# Altium PCB board.PcbDoc
Units mm, origin at the board's own origin, x right, y up, seen from the top; angles counter-clockwise.
Board outline 94 x 69 mm, 2 copper layers (Top Layer, Bottom Layer); 27 components, 94 nets, 289 pads, 27 vias.
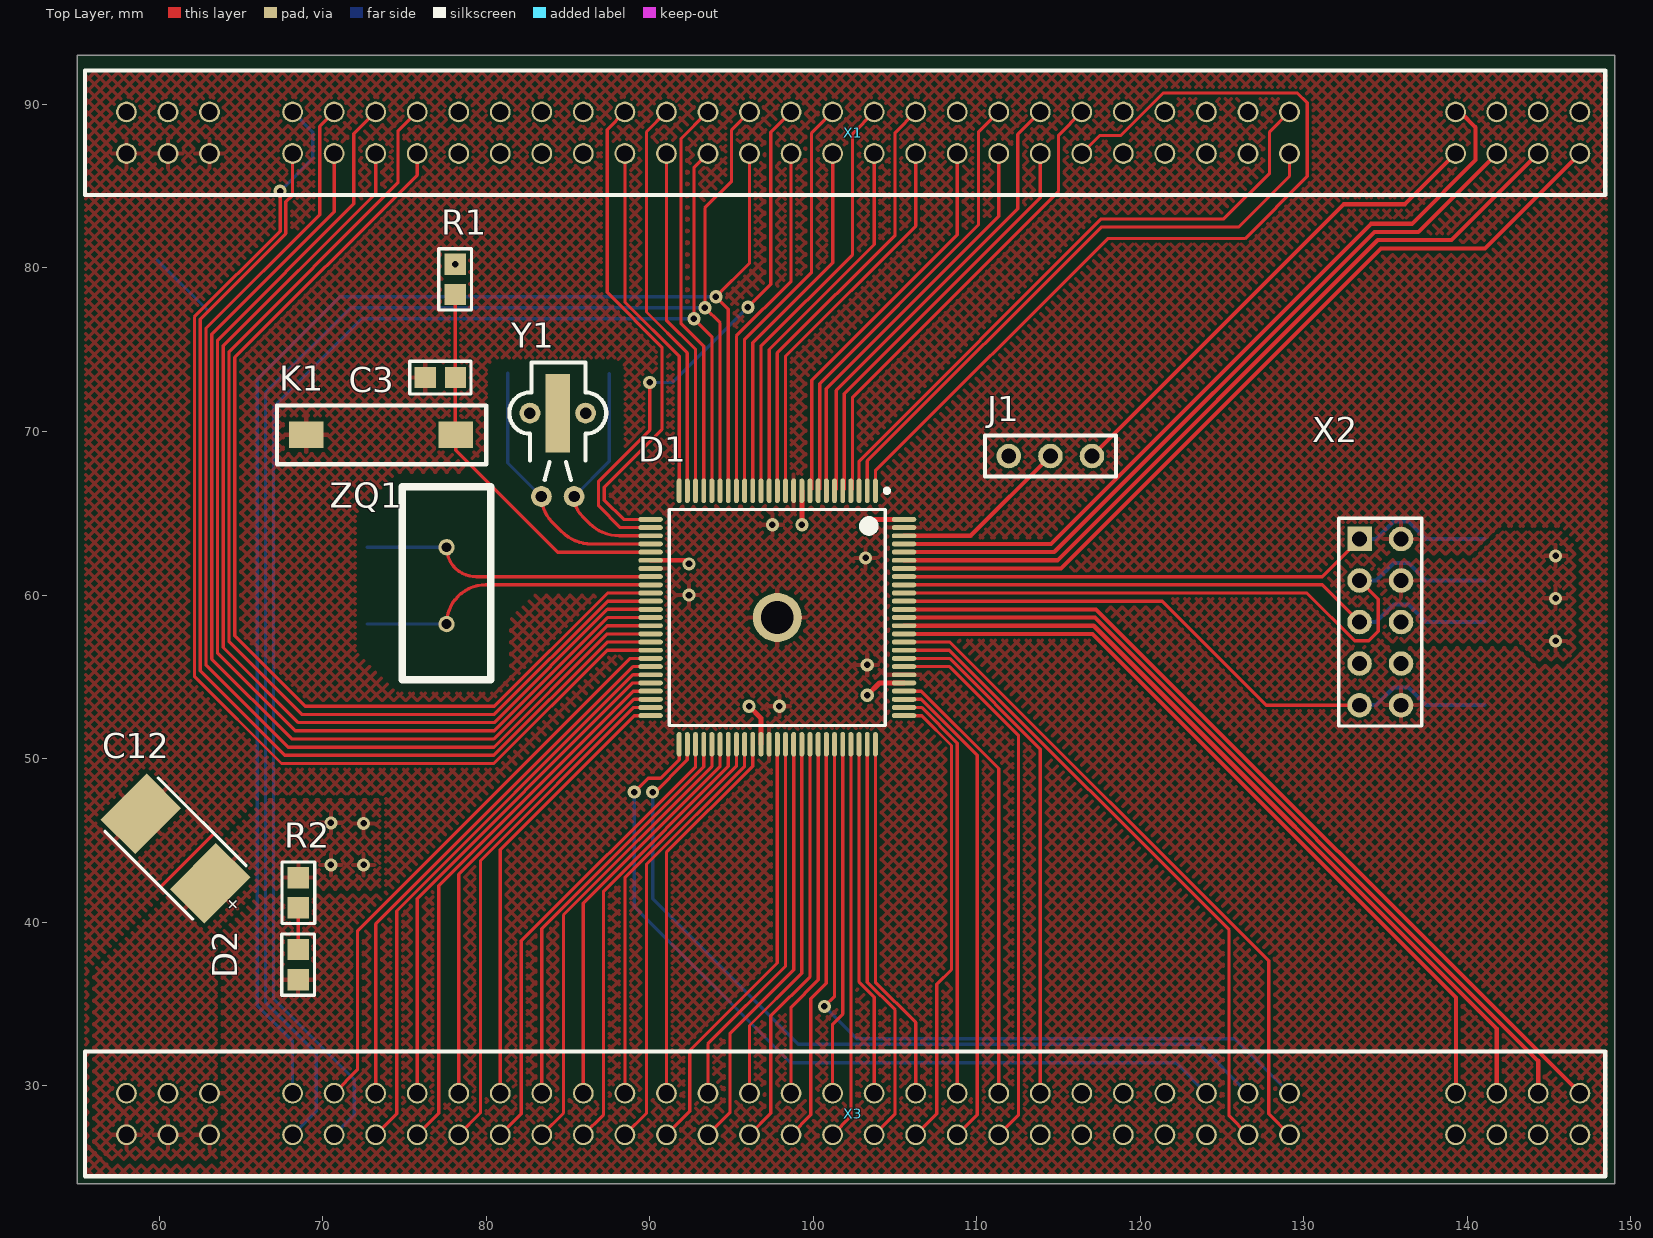
[diagram p0: Top Layer view]
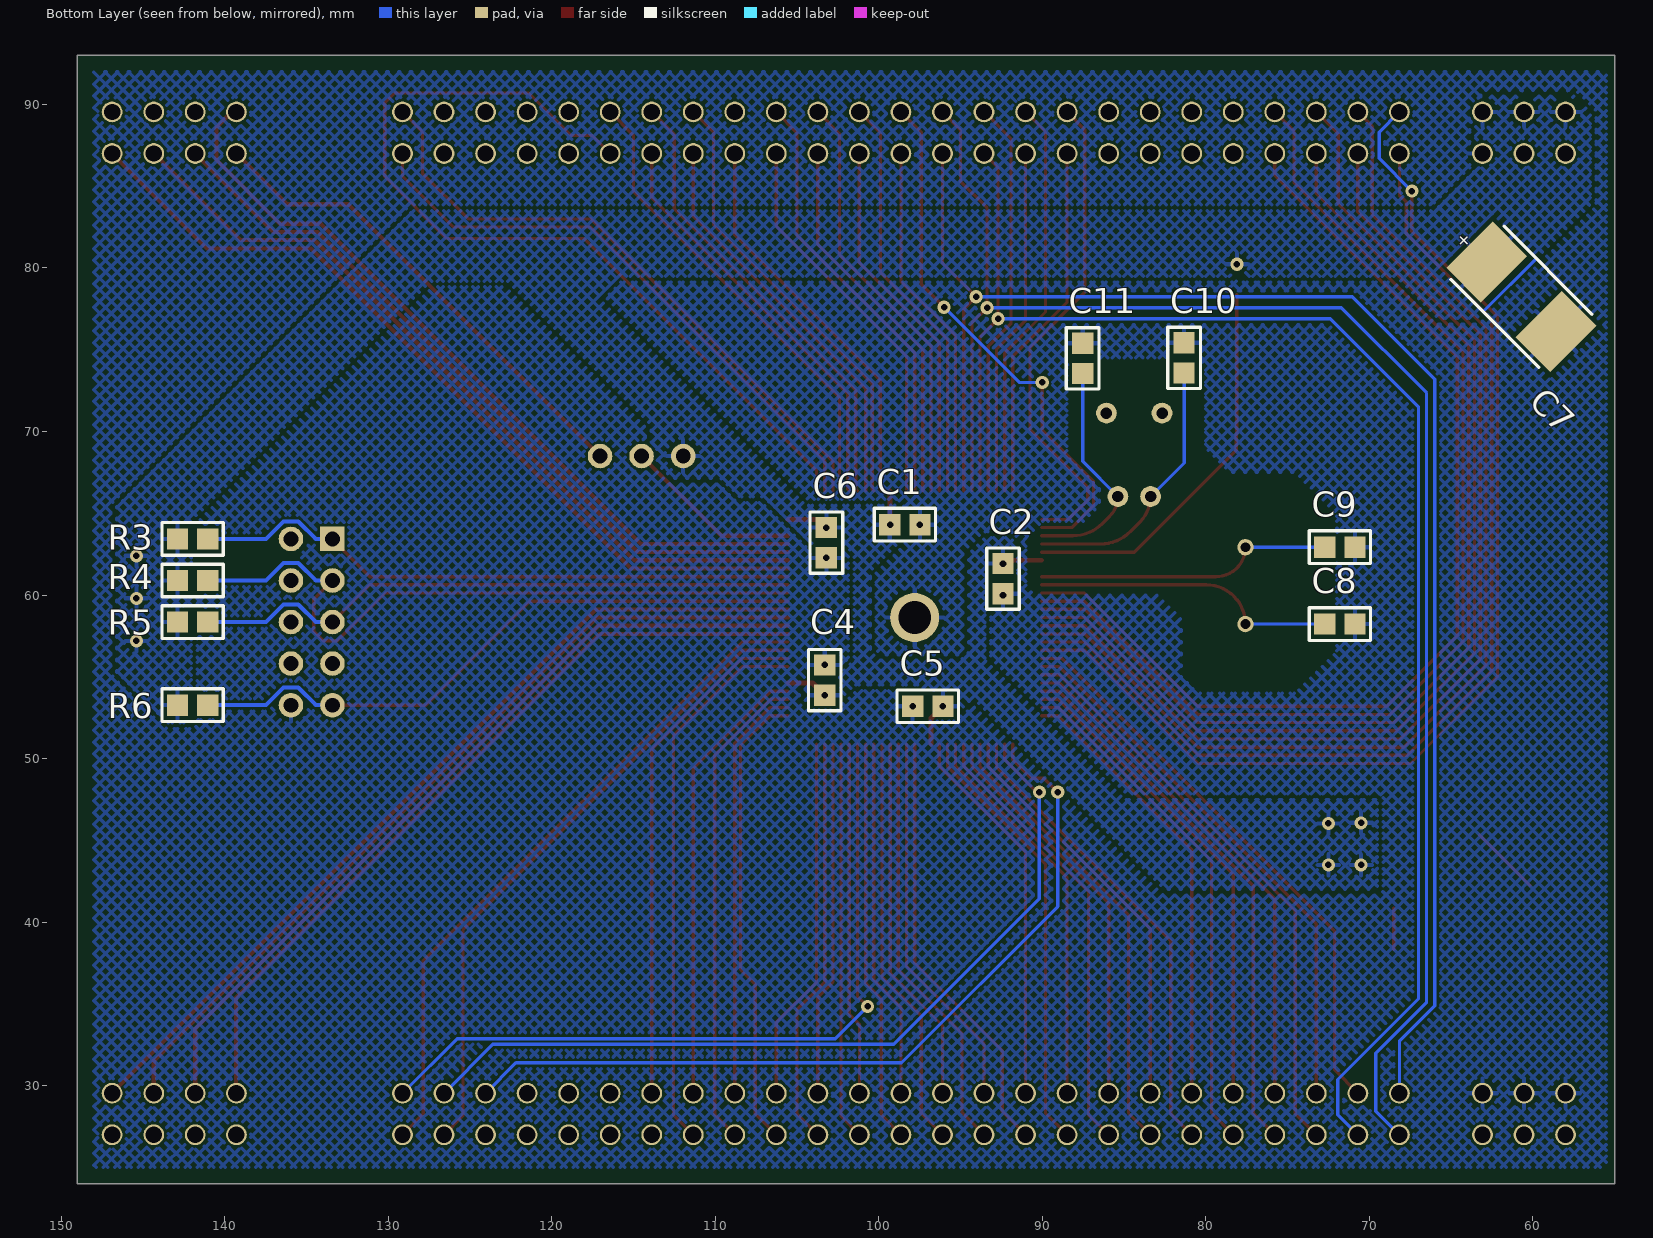
[diagram p1: Bottom Layer view, seen from below]

## Layer stack, top to bottom
Top Solder: solder mask 0.0102, Solder Resist, Dk 3.5
Top Layer: signal copper 0.0356
Dielectric 1: dielectric 0.32, FR-4, Dk 4.8
Bottom Layer: signal copper 0.0356
Bottom Solder: solder mask 0.0102, Solder Resist, Dk 3.5

## Board outline
55,24 149,24 149,93 55,93

## Design rules (kind name [scope] priority, off if disabled: settings)
Clearance [All] p1: gap=0.15 ignorepadtopadclearanceinfootprint=FALSE except(0: Arc-Hole Track-Hole SMDPad-Hole THPad-Hole Via-Hole Fill-Hole Poly-Hole Region-Hole Text-Hole)
ComponentClearance [All] p1: gap=-1 collisioncheckmode=3 verticalgap=0.254 showdistances=FALSE
MatchedLengths osc32 [InNetClass('osc32')] p1: tolerance=1 checknetsindiffpair=FALSE checkdiffpairvsdiffpair=TRUE checkxsignals=TRUE checkothers=TRUE
MatchedLengths XTAL [InNetClass('XTAL')] p2: tolerance=1 checknetsindiffpair=FALSE checkdiffpairvsdiffpair=TRUE checkxsignals=TRUE checkothers=TRUE
PolygonConnect [All] p1: connectstyle=Relief reliefconductorwidth=0.254 reliefentries=4 polygonreliefangle="90 Angle" airgapwidth=0.254
RoutingVias [All] p1: holewidth=0.4 width=0.8 viastyle="Through Hole" minholewidth=0.4 minwidth=0.8 maxholewidth=0.711 maxwidth=1.27
SolderMaskExpansion [All] p1: expansion=0.102
Width [All] p1: maxlimit=3 minlimit=0.2 preferedwidth=0.2
29 further rules are at their usual default settings.

## Components (designator, comment, footprint, x,y, rotation, side; value= is the part's Value field where it differs from the comment)
C1 "0.1u" 0805 98.4,64.3 r0 bottom
C2 "0.1u" 0805 92.4,61 r90 bottom
C3 "0.1u" 0805 77.2,73.3 r0 top
C4 "0.1u" 0805 103.3,54.8 r90 bottom
C5 "0.1u" 0805 97,53.2 r0 bottom
C6 "0.1u" 0805 103.2,63.2 r270 bottom
C7 "C_Ta" C_Ta 60.7,78.238 r225 bottom
C8 "22p" 0805 71.8,58.225 r0 bottom
C9 "22p" 0805 71.8,62.925 r0 bottom
C10 "*" 0805 81.325,74.5 r270 bottom
C11 "*" 0805 87.525,74.475 r270 bottom
C12 "C_Ta" C_Ta 61,44.5 r135 top
D1 "ATmega2560" ATmega2560-16AU 97.8,58.625 r270 top locked
D2 "LED0805" 0805 68.5,37.4 r270 top
J1 "JUMPER_SWITCH_2S" JUMPER_SWITCH_2S 114.5,68.5 r0 top
K1 "SMD_BUTTON" SMD_BUTTON 69,69.8 r0 top
R1 "*" 0805 78.1,79.3 r270 top
R2 "*" 0805 68.513,41.796 r270 top
R3 "*" 0805 141.95,63.429 r0 bottom
R4 "*" 0805 141.95,60.889 r0 bottom
R5 "*" 0805 141.95,58.349 r0 bottom
R6 "*" 0805 141.95,53.269 r0 bottom
X1 "CONNECTOR_TOP" Connector 58,87 r0 top locked
X2 "AVR_JTAG" JTAG_PLD 134.65,58.263 r270 top
X3 "CONNECTOR_BOTTOM" Connector 58,27 r0 top locked
Y1 "CLOCK_OSC" CLOCK_OSC 84.375,71.125 r270 top
ZQ1 "10m" XTAL 77.575,62.925 r270 top

## Footprints (in the part's own frame and the unit in brackets; to place one, negate y for a bottom-side part, rotate by r counter-clockwise, add the part's x,y. Pads: shape width x height; smd on the part's side, far side on the other; paste and mask are expansions set on the pad)
0805 [mm]
  rect 1.3x1.3 smd: 1(-0.925,0) 2(0.925,0)
  silkscreen extent -1.88,-1 1.88,1, body extent -1,-0.63 1,0.63, height 0.4
ATmega2560-16AU [mm]
  oval 1.5x0.3 smd: 1(-7.75,6) 2(-7.75,5.5) 3(-7.75,5) 4(-7.75,4.5) 5(-7.75,4) 6(-7.75,3.5) 7(-7.75,3) 8(-7.75,2.5) 9(-7.75,2) 10(-7.75,1.5) 11(-7.75,1) 12(-7.75,0.5) 13(-7.75,0) 14(-7.75,-0.5) 15(-7.75,-1) 16(-7.75,-1.5) 17(-7.75,-2) 18(-7.75,-2.5) 19(-7.75,-3) 20(-7.75,-3.5) 21(-7.75,-4) 22(-7.75,-4.5) 23(-7.75,-5) 24(-7.75,-5.5) 25(-7.75,-6) 51(7.75,-6) 52(7.75,-5.5) 53(7.75,-5) 54(7.75,-4.5) 55(7.75,-4) 56(7.75,-3.5) 57(7.75,-3) 58(7.75,-2.5) 59(7.75,-2) 60(7.75,-1.5) 61(7.75,-1) 62(7.75,-0.5) 63(7.75,0) 64(7.75,0.5) 65(7.75,1) 66(7.75,1.5) 67(7.75,2) 68(7.75,2.5) 69(7.75,3) 70(7.75,3.5) 71(7.75,4) 72(7.75,4.5) 73(7.75,5) 74(7.75,5.5) 75(7.75,6)
  oval 0.3x1.5 smd: 26(-6,-7.75) 27(-5.5,-7.75) 28(-5,-7.75) 29(-4.5,-7.75) 30(-4,-7.75) 31(-3.5,-7.75) 32(-3,-7.75) 33(-2.5,-7.75) 34(-2,-7.75) 35(-1.5,-7.75) 36(-1,-7.75) 37(-0.5,-7.75) 38(0,-7.75) 39(0.5,-7.75) 40(1,-7.75) 41(1.5,-7.75) 42(2,-7.75) 43(2.5,-7.75) 44(3,-7.75) 45(3.5,-7.75) 46(4,-7.75) 47(4.5,-7.75) 48(5,-7.75) 49(5.5,-7.75) 50(6,-7.75) 76(6,7.75) 77(5.5,7.75) 78(5,7.75) 79(4.5,7.75) 80(4,7.75) 81(3.5,7.75) 82(3,7.75) 83(2.5,7.75) 84(2,7.75) 85(1.5,7.75) 86(1,7.75) 87(0.5,7.75) 88(0,7.75) 89(-0.5,7.75) 90(-1,7.75) 91(-1.5,7.75) 92(-2,7.75) 93(-2.5,7.75) 94(-3,7.75) 95(-3.5,7.75) 96(-4,7.75) 97(-4.5,7.75) 98(-5,7.75) 99(-5.5,7.75) 100(-6,7.75)
  silkscreen extent -7.87,-6.6 6.6,6.83, body extent -7,-7 7,7, height 1.2
C_Ta [mm]
  rect 3x4 smd: 1(-3,0) 2(3,0)
  Top Layer lines w0.2: -1.016,2.159 -1.016,-2.159
  silkscreen extent -3.8,-2.3 3.8,2.3, body extent -3.8,-2.3 3.8,2.3, height 4.3
CLOCK_OSC [mm]
  round 1.27 hole 0.7: 1(5.1,-1) 2(5.1,1) 3(0,1.7) 5(0,-1.7)
  rect 4.8x1.5 smd mask+0: 4(0,0)
  silkscreen extent -3.1,-2.96 4.1,2.96
Connector [mm] "MCU/FPGA board connector"
  round 1.27 / inner round 0.8 / far side round 1.27 hole 1: 0(0,2.54) 1(2.54,2.54) 2(5.08,2.54) 3(10.16,2.54) 4(12.7,2.54) 5(15.24,2.54) 6(17.78,2.54) 7(20.32,2.54) 8(22.86,2.54) 9(25.4,2.54) 10(27.94,2.54) 11(30.48,2.54) 12(33.02,2.54) 13(35.56,2.54) 14(38.1,2.54) 15(40.64,2.54) 16(43.18,2.54) 17(45.72,2.54) 18(48.26,2.54) 19(50.8,2.54) 20(53.34,2.54) 21(55.88,2.54) 22(58.42,2.54) 23(60.96,2.54) 24(63.5,2.54) 25(66.04,2.54) 26(68.58,2.54) 27(71.12,2.54) 28(81.275,2.54) 29(83.795,2.54) 30(86.325,2.54) 31(88.875,2.54) 32(88.875,0) 33(86.325,0) 34(83.795,0) 35(81.275,0) 36(71.12,0) 37(68.58,0) 38(66.04,0) 39(63.5,0) 40(60.96,0) 41(58.42,0) 42(55.88,0) 43(53.34,0) 44(50.8,0) 45(48.26,0) 46(45.72,0) 47(43.18,0) 48(40.64,0) 49(38.1,0) 50(35.56,0) 51(33.02,0) 52(30.48,0) 53(27.94,0) 54(25.4,0) 55(22.86,0) 56(20.32,0) 57(17.78,0) 58(15.24,0) 59(12.7,0) 60(10.16,0) 61(5.08,0) 62(2.54,0) 63(0,0)
  silkscreen extent -2.54,-2.54 90.43,5.08
JTAG_PLD [mm]
  rect 1.5x1.5 hole 0.9: 1(-5.166,-1.248)
  round 1.5 hole 0.9: 2(-5.166,1.292) 3(-2.626,-1.248) 4(-2.626,1.292) 5(-0.086,-1.248) 6(-0.086,1.292) 7(2.454,-1.248) 8(2.454,1.292) 9(4.994,-1.248) 10(4.994,1.292)
  silkscreen extent -6.44,-2.52 6.26,2.56, body extent -10.3,-4.4 10.3,4.4, height 9.1
JUMPER_SWITCH_2S [mm] "2 state jumper switch"
  round 1.5 hole 0.9: 0(0,0) 1(-2.54,0) 2(2.54,0)
  silkscreen extent -4,-1.25 4,1.25
SMD_BUTTON [mm]
  rect 2.1x1.6 smd: 1(0,0) 2(9.144,0)
  silkscreen extent -1.8,-1.8 11,1.8, body extent -0.4,-1.7 9.6,1.8, height 5
XTAL [mm]
  round 1 hole 0.6: 1(0,0) 2(4.7,0)
  silkscreen extent -3.7,-2.7 8.1,2.7, body extent -3.41,-2.32 7.76,2.35, height 3.63

## Part data
C1 C2 C3 C4 C5 C6 C8 C9 C10 C11: library part C0805, "0805 ceramic capacitor"
  C1 C2 C3 C4 C5 C6: capacity=0.1u
  C8 C9: capacity=22p
C7 C12: "tantalum capacitor"
J1: "2 state jumper switch"
K1: "smd micro button"
R1 R2 R3 R4 R5 R6: library part R0805, "0805 resistor"
X1 X3: "control board connector"
Y1: "low speed external clock"
ZQ1: library part XTAL, Frequency=10m

## Free pads (board coordinates)
  round 3 hole 2: 3(97.8,58.625)

## Via types
v1: diameter 0.8, hole 0.4, Top Layer to Bottom Layer, 27 vias

## Nets (pads, with @x,y where several pads share a name; then routed paths per layer and width w, separated by ;. In a path a pad name is that pad's centre, name@x,y a point inside that pad or via, vN(x,y) a via of type N, cw(c..) or ccw(c..) an arc to the next point about the centre after c; other vN are vias at no path point)
7CLK: D1.46 X3.6 | length 31.6
  Top Layer w0.2: X3.6 75.78,41.441 88.964,54.625 D1.46
7DATA: D1.47 X3.57 | length 33.7
  Top Layer w0.2: X3.57 77.1,28.32 77.1,42.228 88.997,54.125 D1.47
ADC0: D1.97 X1.28 | length 48.3
  Top Layer w0.254: D1.97 114.525,63.125 134.1,82.7 136.6,82.7 140.5,86.6 140.5,88.6 139.56,89.54 X1.28
ADC1: D1.96 X1.34 | length 46.3
  Top Layer w0.254: D1.96 114.732,62.625 134.307,82.2 136.995,82.2 X1.34
ADC2: D1.95 X1.33 | length 49.1
  Top Layer w0.254: D1.95 114.939,62.125 134.514,81.7 139.025,81.7 X1.33
ADC3: D1.94 X1.32 | length 51.8
  Top Layer w0.254: D1.94 115.146,61.625 134.721,81.2 141.075,81.2 X1.32
ADC8: D1.89 X3.31 | length 53.6
  Top Layer w0.254: D1.89 117.29,59.125 X3.31
ADC9: D1.88 X3.30 | length 52
  Top Layer w0.254: D1.88 117.219,58.625 144.325,31.519 X3.30
ADC10: D1.87 X3.29 | length 50.4
  Top Layer w0.254: D1.87 117.147,58.125 141.795,33.477 X3.29
ADC11: D1.86 X3.28 | length 48.8
  Top Layer w0.254: D1.86 117.076,57.625 139.3,35.401 139.3,29.565 X3.28
ADC_REF: J1.2 X1.35 | length 29.9
  Top Layer w0.254: J1.2 132.44,83.9 136.175,83.9 X1.35
AREF: D1.98 J1.0 | length 11
  Top Layer w0.254: D1.98 109.625,63.625 J1.0
BTN1: D1.51 X3.25 | length 51.2
  Top Layer w0.2: v1(89.05,47.95) 89.9,48.8 90.662,48.8 91.8,49.938 D1.51
  Bottom Layer w0.2: v1(89.05,47.95) 89.05,40.953 98.607,31.396 122.184,31.396 X3.25
BTN2: D1.52 X3.26 | length 51.7
  Top Layer w0.2: v1@90.179,47.802 92.3,49.923 D1.52
  Bottom Layer w0.2: v1@90.179,47.802 90.179,41.421 99.075,32.525 123.595,32.525 X3.26
  other v1: 90.179,47.95
BTN3: D1.70 X3.27 | length 46.9
  Top Layer w0.2: v1(100.675,34.85) 101.3,35.475 D1.70
  Bottom Layer w0.2: v1(100.675,34.85) 102.65,32.875 125.785,32.875 X3.27
DIP0: D1.53 X3.55 | length 28.8
  Top Layer w0.2: X3.55 82.15,28.29 82.15,38.854 92.8,49.504 D1.53
DIP1: D1.54 X3.9 | length 25.4
  Top Layer w0.2: X3.9 83.4,39.609 93.3,49.509 D1.54
DIP2: D1.55 X3.54 | length 28.2
  Top Layer w0.2: X3.54 84.725,28.325 84.725,40.439 93.8,49.514 D1.55
DIP3: D1.56 X3.10 | length 24.8
  Top Layer w0.2: X3.10 85.94,41.159 94.3,49.519 D1.56
DIP4: D1.57 X3.53 | length 27.5
  Top Layer w0.2: X3.53 87.175,28.235 87.175,41.899 94.8,49.524 D1.57
DIP5: D1.58 X3.11 | length 24.2
  Top Layer w0.2: X3.11 88.48,42.709 95.3,49.529 D1.58
DIP6: D1.59 X3.52 | length 26.9
  Top Layer w0.2: X3.52 89.8,28.32 89.8,43.534 95.8,49.534 D1.59
DIP7: D1.60 X3.12 | length 23.5
  Top Layer w0.2: X3.12 91.02,44.259 96.3,49.539 D1.60
ENCA: D1.85 X3.36 | length 41.5
  Top Layer w0.2: D1.85 108.358,57.125 127.85,37.633 127.85,28.27 X3.36
ENCB: D1.84 X3.37 | length 40
  Top Layer w0.2: D1.84 108.325,56.625 125.425,39.525 125.425,28.155 X3.37
GND: C1.1 C2.1 C3.1 C4.2 C5.2 C6.2 C7.2 C8.1 C9.1 C10.1 C11.1 C12.2 D1.11 D1.32 D1.62 D1.81 D1.99 D2.2 K1.1 pad.3 X1.61 X1.62 X1.63 X2.2 X2.10 X3.0 X3.1 X3.2
  other v1: 97.925,53.2 103.3,55.725 92.4,60 103.2,62.275 97.5,64.3
KC1: D1.64 X3.13 | length 23.3
  Top Layer w0.2: X3.13 93.56,32.553 98.3,37.293 D1.64
KC2: D1.65 X3.50 | length 26
  Top Layer w0.2: X3.50 94.9,28.34 94.9,33.186 98.8,37.086 D1.65
KC3: D1.63 X3.51 | length 26.7
  Top Layer w0.2: X3.51 92.45,28.43 92.45,32.15 97.8,37.5 D1.63
KR1: D1.66 X3.14 | length 22.7
  Top Layer w0.2: X3.14 96.1,33.679 99.3,36.879 D1.66
KR2: D1.69 X3.48 | length 24.8
  Top Layer w0.2: X3.48 99.85,28.21 99.85,35.307 100.8,36.257 D1.69
KR3: D1.68 X3.15 | length 22
  Top Layer w0.2: X3.15 98.64,34.805 100.3,36.465 D1.68
KR4: D1.67 X3.49 | length 25.4
  Top Layer w0.2: X3.49 97.4,28.3 97.4,34.272 99.8,36.672 D1.67
LCD_CS1: D1.50 X3.8 | length 27.5
  Top Layer w0.2: X3.8 80.86,44.427 89.058,52.625 D1.50
LCD_CS2: D1.49 X3.56 | length 31.6
  Top Layer w0.2: X3.56 79.65,28.33 79.65,43.75 89.025,53.125 D1.49
LCD_DB0: D1.78 X3.44 | length 29.6
  Top Layer w0.2: D1.78 106.615,53.625 110.025,50.215 110.025,28.225 X3.44
LCD_DB1: D1.77 X3.19 | length 25.6
  Top Layer w0.2: D1.77 106.62,53.125 108.8,50.945 X3.19
LCD_DB2: D1.76 X3.45 | length 28.4
  Top Layer w0.2: D1.76 106.625,52.625 108.45,50.8 108.45,37.1 107.55,36.2 107.55,28.29 X3.45
LCD_DB3: D1.75 X3.18 | length 22.4
  Top Layer w0.2: D1.75 103.8,36.325 106.26,33.865 X3.18
LCD_DB4: D1.74 X3.46 | length 25.1
  Top Layer w0.2: D1.74 103.3,36.33 105,34.63 105,28.28 X3.46
LCD_DB5: D1.73 X3.17 | length 21.7
  Top Layer w0.2: D1.73 102.8,36.335 103.72,35.415 X3.17
LCD_DB6: D1.72 X3.47 | length 24.3
  Top Layer w0.2: X3.47 102.3,28.12 D1.72
LCD_DB7: D1.71 X3.16 | length 21.6
  Top Layer w0.2: X3.16 101.18,33.755 101.8,34.375 D1.71
LCD_DI: D1.83 X3.21 | length 31.7
  Top Layer w0.2: D1.83 108.33,56.125 113.88,50.575 X3.21
LCD_OE: D1.79 X3.20 | length 27.6
  Top Layer w0.2: D1.79 106.61,54.125 111.34,49.395 X3.20
LCD_RST: D1.48 X3.7 | length 29.5
  Top Layer w0.2: X3.7 78.32,42.915 89.03,53.625 D1.48
LCD_RW: D1.82 X3.43 | length 33.7
  Top Layer w0.2: D1.82 108.335,55.625 112.55,51.41 112.55,28.21 X3.43
MISO: D1.22 X1.13 | length 24.4
  Top Layer w0.2: D1.22 93.3,75.221 91.905,76.616 91.905,87.885 X1.13
MOSI: D1.21 X1.50 X3.59 | length 96.4
  Top Layer w0.2: X1.50 92.7,86.14 v1(92.7,76.895) 93.8,75.795 D1.21
  Bottom Layer w0.2: X3.59 71.924,28.224 71.924,30.376 67,35.3 67,71.513 72.382,76.895 v1(92.7,76.895)
NetD2_1: D2.1 R2.2 | length 2.5
  Top Layer w0.2: D2.1 R2.2@68.5,40.858
nRST: C3.2 D1.30 K1.2 R1.2 | length 24
  Top Layer w0.2: R1.2 78.1,69.844 K1.2 78.144,68.856 84.375,62.625 D1.30
nSS: D1.19 X1.49 X3.3 | length 96.5
  Top Layer w0.2: D1.19 94.8,77.482 v1(94.044,78.238) 96.1,80.295 X1.49
  Bottom Layer w0.2: X3.3 68.16,32.726 66,34.886 66,73.2 71.038,78.238 v1(94.044,78.238)
P_2_1: D1.35 X1.57 | length 64.2
  Top Layer w0.2: X1.57 75.78,85.68 64.632,74.532 64.632,57.5 68.932,53.2 80.5,53.2 87.425,60.125 D1.35
P_2_2: D1.36 X1.6 | length 67.6
  Top Layer w0.2: X1.6 74.6,88.36 74.6,85.207 64.278,74.885 64.278,57.146 68.724,52.7 80.495,52.7 87.42,59.625 D1.36
P_2_3: D1.37 X1.58 | length 65
  Top Layer w0.2: X1.58 73.24,84.554 63.924,75.239 63.924,56.793 68.517,52.2 80.49,52.2 87.415,59.125 D1.37
P_2_4: D1.38 X1.5 | length 68.4
  Top Layer w0.2: X1.5 71.9,88.2 71.9,83.921 63.571,75.592 63.571,56.439 68.31,51.7 80.485,51.7 87.41,58.625 D1.38
P_2_5: D1.39 X1.59 | length 65.7
  Top Layer w0.2: X1.59 70.7,83.428 63.217,75.946 63.217,56.086 68.103,51.2 80.48,51.2 87.405,58.125 D1.39
P_2_6: D1.40 X1.4 | length 69.2
  Top Layer w0.2: X1.4 69.815,88.655 69.815,83.251 62.864,76.299 62.864,55.732 67.896,50.7 80.475,50.7 87.4,57.625 D1.40
P_2_7: D1.41 X1.60 | length 66.5
  Top Layer w0.2: X1.60 68.16,84.46 67.75,84.05 67.75,82.105 62.51,76.865 62.51,55.379 67.689,50.2 80.47,50.2 87.395,57.125 D1.41
P_2_8: D1.42 X1.3 | length 71
  Top Layer w0.2: v1(67.4,84.7) 67.4,82.25 62.157,77.006 62.157,55.025 67.482,49.7 80.465,49.7 87.39,56.625 D1.42
  Bottom Layer w0.2: v1(67.4,84.7) 69.4,86.7 69.4,88.3 X1.3
P_4_5: D1.23 X1.51 | length 21.4
  Top Layer w0.2: X1.51 91.02,76.794 92.8,75.014 D1.23
P_4_6: D1.24 X1.12 | length 24.7
  Top Layer w0.2: X1.12 89.8,88.32 89.8,77.307 92.3,74.807 D1.24
P_4_7: D1.25 X1.52 | length 22
  Top Layer w0.2: X1.52 88.48,77.92 91.8,74.6 D1.25
P_4_8: D1.26 X1.11 | length 30.3
  Top Layer w0.2: X1.11 87.4,88.46 87.4,78.505 90.742,75.163 90.742,70.121 87.224,66.603 87.224,65.8 88.399,64.625 D1.26
P_5_1: D1.12 X1.45 | length 23.9
  Top Layer w0.2: D1.12 98.3,74.6 106.26,82.56 X1.45
P_5_2: D1.13 X1.18 | length 26.7
  Top Layer w0.2: D1.13 97.8,74.807 105,82.007 105,88.28 X1.18
P_5_3: D1.14 X1.46 | length 23.3
  Top Layer w0.2: D1.14 97.3,75.014 103.72,81.434 X1.46
P_5_4: D1.15 X1.17 | length 26
  Top Layer w0.2: D1.15 96.8,75.221 102.4,80.821 102.4,88.22 X1.17
P_5_5: D1.16 X1.47 | length 22.7
  Top Layer w0.2: D1.16 96.3,75.428 101.186,80.314 101.186,86.994 X1.47
P_5_6: D1.17 X1.16 | length 25.4
  Top Layer w0.2: D1.17 95.8,75.636 99.897,79.733 99.897,88.257 X1.16
P_5_7: D1.18 X1.48 | length 22
  Top Layer w0.2: D1.18 95.3,75.843 98.64,79.183 X1.48
P_5_8: D1.27 X1.15 | length 33.5
  Top Layer w0.2: v1(90,73) 90,70.086 86.87,66.956 86.87,65.446 88.192,64.125 D1.27 ; v1(96,77.6) 97.4,79 97.4,88.3 X1.15
  Bottom Layer w0.2: v1(90,73) 91.4,73 v1(96,77.6)
P_7_1: D1.1 X1.41 | length 55.1
  Top Layer w0.2: D1.1 103.8,67.598 118.002,81.8 126.4,81.8 130.2,85.6 130.2,90.1 129.6,90.7 121.4,90.7 118.8,88.1 117.52,88.1 X1.41
P_7_2: D1.4 X1.22 | length 29
  Top Layer w0.2: D1.4 102.4,66.475 102.4,72.1 115,84.7 115,88.12 X1.22
P_7_3: D1.5 X1.42 | length 25.6
  Top Layer w0.2: D1.5 101.9,66.475 101.9,72.307 113.88,84.287 X1.42
P_7_4: D1.6 X1.21 | length 28.4
  Top Layer w0.2: D1.6 101.4,66.475 101.4,72.514 112.503,83.617 112.503,88.162 X1.21
P_7_5: D1.7 X1.43 | length 25
  Top Layer w0.2: D1.7 100.8,72.621 111.34,83.161 X1.43
P_7_6: D1.8 X1.20 | length 27.7
  Top Layer w0.2: D1.8 100.4,66.475 100.4,72.928 110.1,82.628 110.1,88.3 X1.20
P_7_7: D1.9 X1.44 | length 24.4
  Top Layer w0.2: D1.9 99.9,66.475 99.9,73.136 108.8,82.036 X1.44
RXD: D1.2 X1.36 | length 36.2
  Top Layer w0.2: D1.2 103.3,68.2 117.6,82.5 126,82.5 129.12,85.62 X1.36
SCK: D1.20 X1.14 X3.60 | length 100.9
  Top Layer w0.2: D1.20 94.3,76.638 v1(93.372,77.567) 93.372,83.672 95,85.3 95,88.44 X1.14
  Bottom Layer w0.2: X3.60 69.6,28.44 69.6,31.993 66.5,35.093 66.5,72.356 71.71,77.567 v1(93.372,77.567)
SCL: D1.43 X3.4 | length 35.3
  Top Layer w0.2: X3.4 72.125,30.965 72.125,39.45 88.8,56.125 D1.43
SDA: D1.44 X3.5 | length 33.7
  Top Layer w0.2: X3.5 73.24,39.891 88.974,55.625 D1.44
SOUND: D1.45 X3.58 | length 35.7
  Top Layer w0.2: X3.58 74.525,28.285 74.525,40.681 88.969,55.125 D1.45
TCK: D1.93 R3.1 X2.1 | length 37.2
  Top Layer w0.2: D1.93 131.125,61.125 132.802,62.802 X2.1@132.802,63.529
  Bottom Layer w0.254: X2.1 134.419,63.429 135.496,64.506 136.388,64.506 137.465,63.429 R3.1
TDI: D1.90 R6.1 X2.9 | length 39
  Top Layer w0.2: D1.90 121.346,59.625 127.702,53.269 X2.9
  Bottom Layer w0.254: X2.9 134.419,53.269 135.496,54.346 136.388,54.346 137.465,53.269 R6.1
TDO: D1.91 R4.1 X2.3 | length 42.6
  Top Layer w0.2: D1.91 130.175,60.125 133.1,57.2 133.975,57.2 134.55,57.775 134.55,59.741 X2.3
  Bottom Layer w0.254: X2.3 134.419,60.889 135.496,61.966 136.388,61.966 137.465,60.889 R4.1
TMS: D1.92 R5.1 X2.5 | length 37.3
  Top Layer w0.2: D1.92 131.126,60.625 X2.5
  Bottom Layer w0.254: X2.5 134.419,58.349 135.496,59.426 136.388,59.426 137.465,58.349 R5.1
TOSC1: C11.2 D1.28 Y1.2 | length 14.3
  Top Layer w0.2: Y1.2 ccw(c87.065,66.025) 85.87,64.83 86.331,64.369 ccw(c88.127,66.165) 88.127,63.625 D1.28
  Bottom Layer w0.2: Y1.2 87.525,68.175 C11.2
TOSC2: C10.2 D1.29 Y1.1 | length 16.6
  Top Layer w0.2: Y1.1 ccw(c85.548,66.025) 84.011,64.489 84.631,63.869 ccw(c86.427,65.665) 86.427,63.125 D1.29
  Bottom Layer w0.2: C10.2 81.325,68.075 Y1.1
TXD: D1.3 X1.27 | length 38.5
  Top Layer w0.2: D1.3 102.8,68.195 117.605,83 125.1,83 127.9,85.8 127.9,88.32 X1.27
VCC3.3: C1.2 C2.2 C4.1 C5.1 C6.1 C7.1 C12.1 D1.10 D1.31 D1.61 D1.80 D1.100 J1.1 R1.1 R2.1 R3.2 R4.2 R5.2 R6.2 X1.0 X1.1 X1.2 X2.4 X3.61 X3.62 X3.63 | length 12.3
  Top Layer w0.3: D1.31 92.175,62.125 v1(92.4,61.9) ; v1(96.075,53.2) 96.8,52.475 D1.61 ; v1(99.3,64.3) D1.10 ; v1(103.2,64.125) 103.7,64.625 D1.100 ; v1(103.3,53.875) 104.05,54.625 D1.80
  other v1: 70.5,43.5 72.5,43.5 72.5,46.039 70.5,46.074 145.395,57.2 145.395,59.8 145.395,62.4 78.1,80.225
XTAL1: C8.2 D1.34 ZQ1.2 | length 18.7
  Top Layer w0.2: ZQ1.2 cw(c79.975,58.225) 79.975,60.625 D1.34
  Bottom Layer w0.2: C8.2 ZQ1.2
XTAL2: C9.2 D1.33 ZQ1.1 | length 18.4
  Top Layer w0.2: ZQ1.1 ccw(c79.375,62.925) 79.375,61.125 D1.33
  Bottom Layer w0.2: C9.2 ZQ1.1
pads on no net: X1.7 X1.8 X1.9 X1.10 X1.19 X1.23 X1.24 X1.25 X1.26 X1.29 X1.30 X1.31 X1.37 X1.38 X1.39 X1.40 X1.53 X1.54 X1.55 X1.56 X2.6 X2.7 X2.8 X3.22 X3.23 X3.24 X3.32 X3.33 X3.34 X3.35 X3.38 X3.39 X3.40 X3.41 X3.42 Y1.3 Y1.4 Y1.5

## Polygon pours and split planes (outlines as drawn)
GND on Bottom Layer "GND" (hatched 45Degree grid 0.508 track 0.21, remove dead copper, pour order 7): 55.5,92 55.5,25 148,25 148,92
VCC3.3 on Bottom Layer "VCC2" (hatched 45Degree grid 0.508 track 0.21, pour order 4): 69.5,47.5 69.5,42 82.5,42 84.5,44 94,53.5 94.5,53.5 95.5,52.5 96.5,52.5 97,53 97,54 97.5,54.5 99.5,54.5 101.5,54.5 102,54 103,53 104,53 104.5,53.5 104.5,54.5 104,55 103,55 102.5,55 102,55.5 101.5,56 101.5,62.5 102.5,63.5 103.5,63.5 104,64 104,65 103.5,65.5 102.5,65.5 99,65.5 98.5,65 98.5,64 98.5,63.5 99,63 100.5,61.5 100.5,60.5 100.5,56.5 100,56 95,56 94.5,56.5 94.5,62.5 93.5,63.5 92,63.5 91.5,63 91.5,62.5 91.5,62 92,61.5 93,61.5 93.5,61 93.5,56 85,47.5
VCC3.3 on Bottom Layer "VCC3" (hatched 45Degree grid 0.508 track 0.21, pour order 5): 102.118,63.118 104.118,63.118 104.5,63.5 107,66 108.5,66 109.64,67.14 112.649,67.14 113.9,68.391 113.9,70.4 116,72.5 122.7,79.2 127.4,79.2 142.035,64.565 142.035,52.2 143.5,52.2 146.6,55.3 146.6,65.4 136,76 128.5,83.5 121.5,83.5 66,83.5 64.5,85 63.5,86 63.5,87 63.5,90 63,90.5 59,90.5 57.5,90.5 56.5,89.5 56.5,86.5 56.5,83.875 63.443,76.932 65.795,76.932 68.364,79.5 115.9,79.5 117.2,78.2 104.5,65.5 104,65.5 103.208,65.5 102.191,64.483
VCC3.3 on Top Layer "VCC1" (hatched 45Degree grid 0.508 track 0.21, pour order 3): 57,25.5 56,26.5 56,37 66.5,47.5 73.5,47.5 73.5,42 66,42 63.5,39.5 63.5,25.5
VCC3.3 on Top Layer "VCC_JTAG" (hatched 45Degree grid 0.508 track 0.21, pour order 6): 134.55,57.95 135.35,57.15 137.25,57.15 143.15,57.15 144.25,56.05 145.25,56.05 146.05,56.05 146.55,56.55 146.55,62.95 145.65,63.85 143.35,63.85 142.05,63.85 140.35,62.15 137.45,62.15 135.15,62.15 134.55,61.55
GND on Top Layer "GNDT" (hatched 45Degree grid 0.508 track 0.21, remove dead copper, pour order 8): 55.5,92 55.5,24.5 148.5,24.5 148.5,92

## Other copper
Top Layer:
  pour cut-out: 72,56.5 73.5,55 74,54.5 74.5,54 80.5,54 81.5,55 81.5,58.5 83,60 90.5,60 91,60.5 91,61 90.8,61.2 89.3,61.2 89.5,61.2 89.3,61.4 89.3,62 89.5,62.3 90.4,62.3 91,62.3 91,63.5 90,64.5 87.5,64.5 86.5,65.5 86.5,66.5 88.5,68.5 88.5,74 88,74.5 80.5,74.5 80,74 80,69 78.5,67.5 74.5,67.5 72,65
Bottom Layer:
  pour cut-out: 72,56.5 73.5,55 74,54.5 74.5,54 80.5,54 81.5,55 81.5,58.5 83,60 90.5,60 91,60.5 91,63.5 90,64.5 87.5,64.5 86.5,65.5 86.5,66.5 88.5,68.5 88.5,74 88,74.5 80.5,74.5 80,74 80,69 78.5,67.5 74.5,67.5 72,65

## Silkscreen, mask and mechanical layers (free items; w line width, h text height)
Mechanical 1:
  lines w0.254: 55,24 55,26 55,93 149,93 149,24 55,24
Mechanical 8:
  lines w0.45: 55,93 149,24.025 ; 55.025,24.025 148.975,93 ; 55.025,58.512 102,58.512 148.975,58.512

## Text inside footprints (layer, text, board x,y; h text height)
C7: Bottom Overlay "+" at 64.737,81.745 h0.75 r45
C12: Top Overlay "+" at 65.037,40.993 h0.75 r135